# Altium PCB EC3mini.PcbDoc
Units mm, origin at the board's own origin, x right, y up, seen from the top; angles counter-clockwise.
Board outline 152.4 x 101.6 mm, 2 copper layers (Top Layer, Bottom Layer); 52 components, 46 nets, 184 pads, 46 vias.
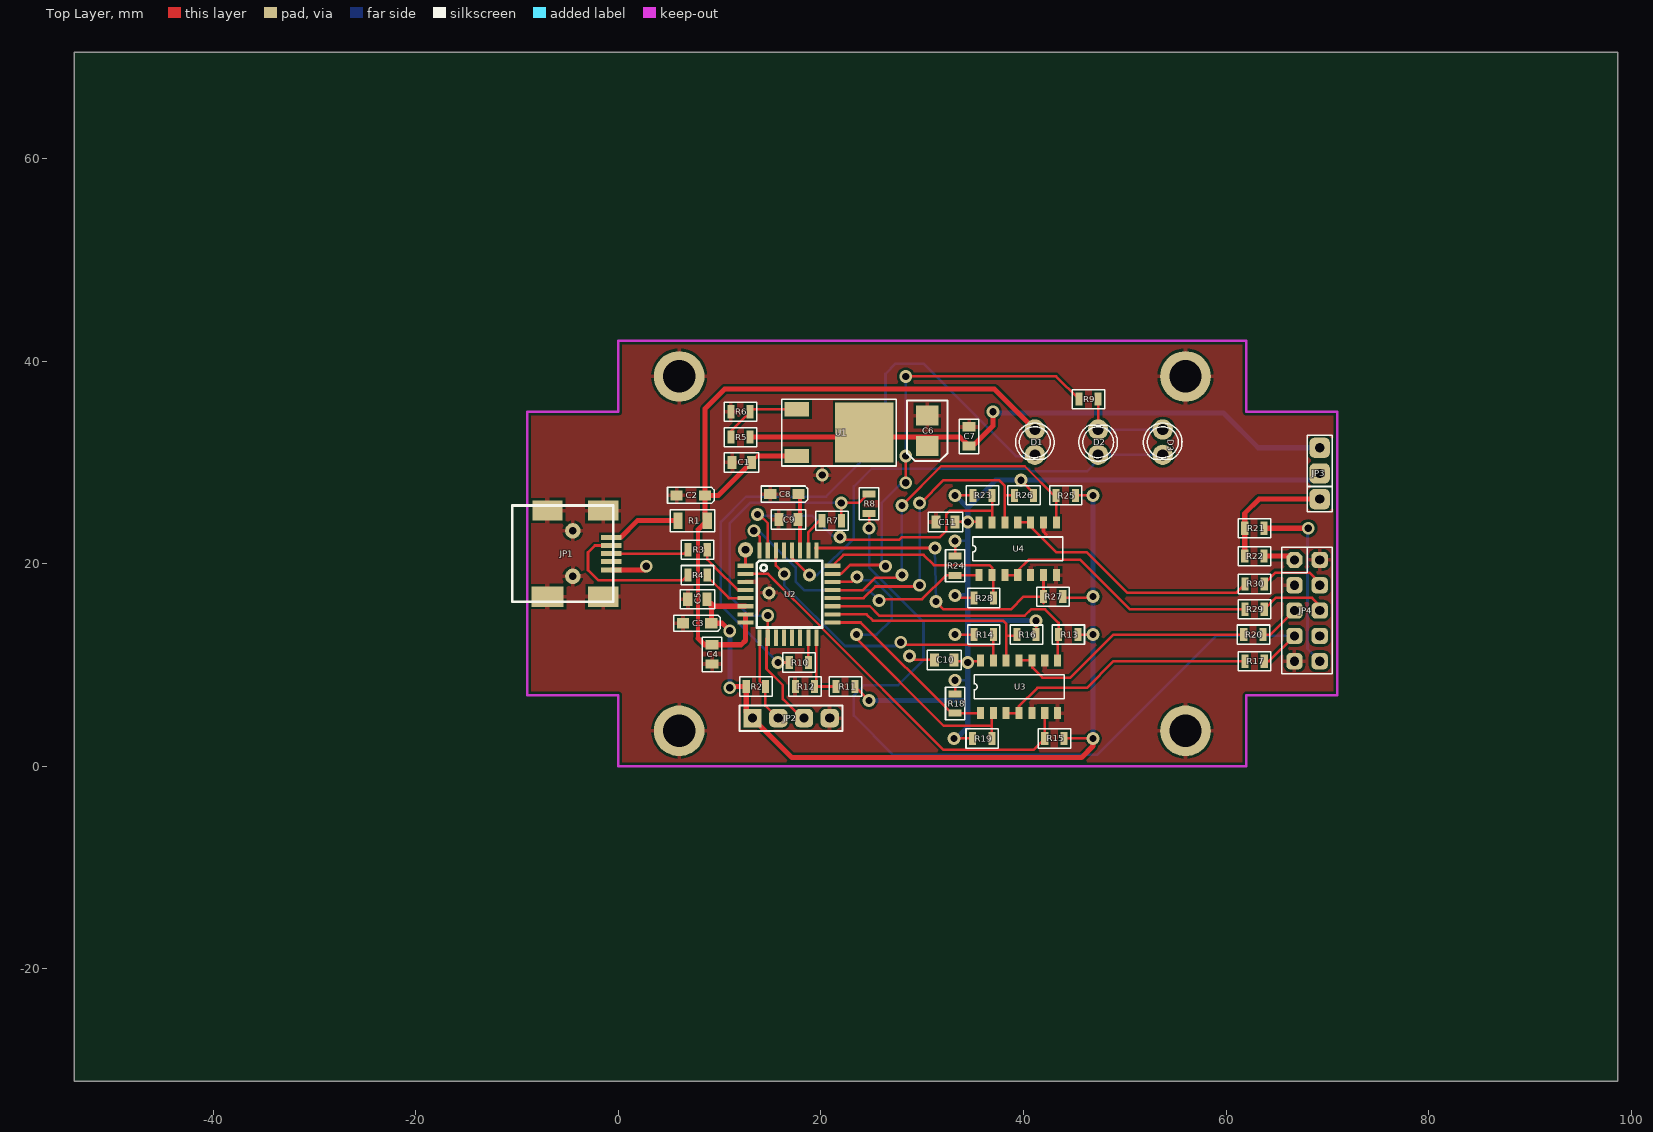
[diagram p0: Top Layer view]
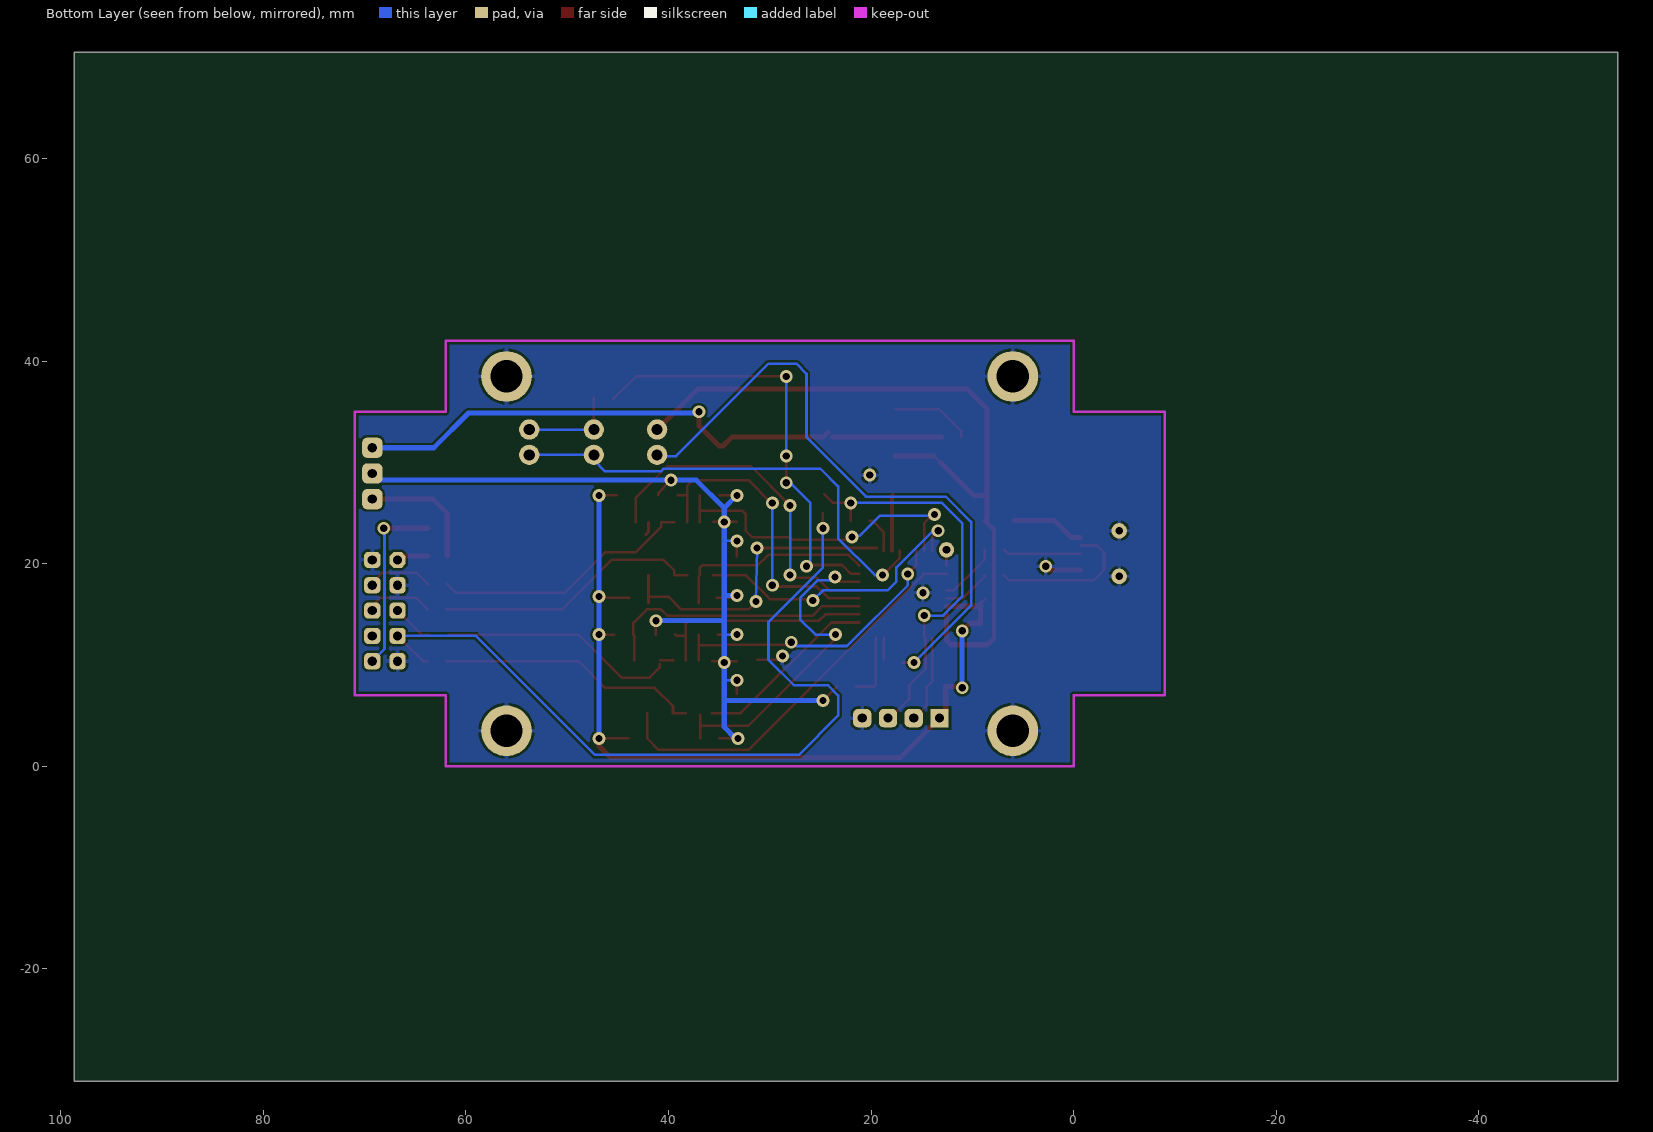
[diagram p1: Bottom Layer view, seen from below]

## Layer stack, top to bottom
Top Layer: signal copper 0.0356
Dielectric: dielectric 0.32, FR-4, Dk 4.8
Bottom Layer: signal copper 0.0356

## Board outline
-53.725,-31.1 98.675,-31.1 98.675,70.5 -53.725,70.5

## Design rules (kind name [scope] priority, off if disabled: settings)
Clearance [All] p1: gap=0.254
HoleSize [All] p1: absolutevalues=TRUE maxlimit=8 minlimit=0.025 maxpercent=80.000 minpercent=20.000
MinimumSolderMaskSliver [All] p1: minsoldermaskwidth=0
PolygonConnect PolygonConnect_1 [All vs IsNamedPolygon('GND') Or  IsNamedPolygon('GND')] p1: connectstyle=Relief reliefconductorwidth=0.4 reliefentries=4 polygonreliefangle="90 Angle"
PolygonConnect [All] p2: connectstyle=Relief reliefconductorwidth=0.254 reliefentries=4 polygonreliefangle="90 Angle"
RoutingVias [All] p1: holewidth=0.711 width=1.27 viastyle="Through Hole" minholewidth=0.711 minwidth=1.27 maxholewidth=0.711 maxwidth=1.27
SilkToSilkClearance [All] p1: silktosilkclearance=0
SilkscreenOverComponentPads [All] p1: minsilkscreentomaskgap=0
SolderMaskExpansion [All] p1: expansion=0.102
Width [All] p1: maxlimit=2 minlimit=0.2 preferedwidth=0.3
24 further rules are at their usual default settings.

## Components (designator, comment, footprint, x,y, rotation, side; value= is the part's Value field where it differs from the comment)
C1 "100n" C-0805 13.125,30 r180 top
C2 "10u" TANTAL-A 5.75,26.75 r0 top
C3 "10u" TANTAL-A 6.375,14.125 r0 top
C4 "100n" C-0805 9.25,12 r270 top
C5 "100n" C-0805 8.75,16.5 r180 top
C6 "33u" TANTAL-B(3528) 30.5,34.625 r270 top
C7 "100n" C-0805 34.625,31.625 r90 top
C8 "10u" TANTAL-A 15,26.875 r0 top
C9 "100n" C-0805 17.75,24.375 r180 top
C10 "100n" C-0805 33.125,10.5 r180 top
C11 "100n" C-0805 33.25,24.125 r180 top
D1 "LED" LED-DIP-1 41.125,32 r90 top
D2 "LED" LED-DIP-1 47.375,32 r270 top
D3 "LED" LED-DIP-1 53.75,32 r90 top
JP1 "USB_mini" miniUSBsmd -1.5,16.75 r90 top
JP2 "Header 4" HDR1X4 13.25,4.75 r0 top
JP3 "JUMPER-3" IDC1-3P 69.25,26.375 r90 top
JP4 "CON5X2" IDC2-5P 66.75,20.375 r270 top
R1 "0" R-1206 5.875,24.25 r0 top
R2 "2k" R-0805 12.625,7.875 r0 top
R3 "22" R-0805 6.875,21.375 r0 top
R4 "22" R-0805 6.875,18.875 r0 top
R5 "240" R-0805 13,32.5 r180 top
R6 "330" R-0805 13,35 r180 top
R7 "1M" R-0805 20.125,24.25 r0 top
R8 "1M5" R-0805 24.75,26.875 r270 top
R9 "470" R-0805 47.375,36.25 r180 top
R10 "470" R-0805 16.875,10.25 r0 top
R11 "1k5" R-0805 23.375,7.875 r180 top
R12 "1k" R-0805 19.375,7.875 r180 top
R13 "1k" R-0805 45.375,13 r180 top
R14 "1k" R-0805 35.125,13 r0 top
R15 "1k" R-0805 44,2.75 r180 top
R16 "1k" R-0805 41.25,13 r180 top
R17 "47" R-0805 61.875,10.375 r0 top
R18 "1k" R-0805 33.25,5.25 r90 top
R19 "1k" R-0805 36.875,2.75 r180 top
R20 "47" R-0805 61.75,13 r0 top
R21 "0" R-0805 63.75,23.5 r180 top
R22 "0" R-0805 63.75,20.75 r180 top
R23 "1k" R-0805 35,26.75 r0 top
R24 "1k" R-0805 33.25,20.75 r270 top
R25 "1k" R-0805 45.125,26.75 r180 top
R26 "1k" R-0805 41,26.75 r180 top
R27 "1k" R-0805 43.875,16.75 r180 top
R28 "1k" R-0805 35.125,16.625 r0 top
R29 "47" R-0805 61.875,15.5 r0 top
R30 "47" R-0805 61.875,18 r0 top
U1 "MC33269" SOT-428-(D-PAK) 17.625,35.25 r270 top
U2 "C8051F320" QFP32 11.75,20 r270 top
U3 "74HC125" SO14-(SOT-108-1) 35.75,5.25 r90 top
U4 "74HC125" SO14-(SOT-108-1) 35.625,18.875 r90 top

## Footprints (in the part's own frame and the unit in brackets; to place one, negate y for a bottom-side part, rotate by r counter-clockwise, add the part's x,y. Pads: shape width x height; smd on the part's side, far side on the other; paste and mask are expansions set on the pad)
C-0805 [mm]
  rect 0.9x1.3 smd: 1(0,0) 2(1.9,0)
  silkscreen extent -0.75,-0.95 2.65,0.95
HDR1X4 [mm] "Connector; Header; 4 Position"
  rect 1.8x1.8 hole 0.9: 1(0,0)
  rrect50% 1.8x1.8 hole 0.9: 2(2.54,0) 3(5.08,0) 4(7.62,0)
  silkscreen extent -1.27,-1.27 8.89,1.27
IDC1-3P [mm]
  rrect50% 2x2 hole 0.9: 1(0,0) 2(2.54,0) 3(5.08,0)
  silkscreen extent -1.25,-1.25 6.33,1.25
IDC2-5P [mm]
  oct 1.6x1.6 hole 0.9: 1(0,0)
  rrect50% 1.6x1.6 hole 0.9: 2(0,2.5) 3(2.5,0) 4(2.5,2.5) 5(5,0) 6(5,2.5) 7(7.5,0) 8(7.5,2.5) 9(10,0) 10(10,2.5)
  silkscreen extent -1.25,-1.25 11.25,3.75
LED-DIP-1 [mm]
  round 2 hole 1.1: A(1.25,0) K(-1.25,0)
  silkscreen extent -1.68,-1.9 1.91,1.9
miniUSBsmd [mm]
  rect 0.5x2 smd: 1(5.85,-0.8) 2(5.05,-0.8) 3(4.25,-0.8) 4(3.45,-0.8) 5(2.65,-0.8)
  rect 2x3.2 smd: 6(0,5.5)
  rect 2x3 smd: 6(0,0) 6(8.5,0) 6(8.5,5.5)
  round 1.524 hole 0.762: 6(2,3) 6(6.5,3)
  silkscreen extent -0.5,-1 9,9
QFP32 [mm]
  rect 0.4x1.6 smd: 1(0.2,0.8) 2(1,0.8) 3(1.8,0.8) 4(2.6,0.8) 5(3.4,0.8) 6(4.2,0.8) 7(5,0.8) 8(5.8,0.8) 17(5.8,9.4) 18(5,9.4) 19(4.2,9.4) 20(3.4,9.4) 21(2.6,9.4) 22(1.8,9.4) 23(1,9.4) 24(0.2,9.4)
  rect 1.6x0.4 smd: 9(7.3,2.2) 10(7.3,3) 11(7.3,3.8) 12(7.3,4.6) 13(7.3,5.4) 14(7.3,6.2) 15(7.3,7) 16(7.3,7.8) 25(-1.3,7.8) 26(-1.3,7) 27(-1.3,6.2) 28(-1.3,5.4) 29(-1.3,4.6) 30(-1.3,3.8) 31(-1.3,3) 32(-1.3,2.2)
  silkscreen extent -0.3,1.9 6.3,8.4
R-0805 [mm]
  rect 0.7x1.3 smd: 1(0,0) 2(1.9,0)
  silkscreen extent -0.65,-0.95 2.55,0.95
R-1206 [mm]
  rect 0.9x1.6 smd: 1(0,0) 2(2.9,0)
  silkscreen extent -0.75,-1.1 3.65,1.1
SO14-(SOT-108-1) [mm]
  rect 1.2x0.7 smd: 1(0,0) 2(0,-1.27) 3(0,-2.54) 4(0,-3.81) 5(0,-5.08) 6(0,-6.35) 7(0,-7.62) 8(5.2,-7.62) 9(5.2,-6.35) 10(5.2,-5.08) 11(5.2,-3.81) 12(5.2,-2.54) 13(5.2,-1.27) 14(5.2,0)
  silkscreen extent 1.43,-8.25 3.77,0.63
SOT-428-(D-PAK) [mm]
  rect 1.4x2.4 smd: 1(0,0) 3(4.6,0)
  rect 5.9x5.75 smd: 2(2.3,6.65)
  silkscreen extent -1,-1.5 5.6,9.82
TANTAL-A [mm]
  rect 1.2x1 smd: 1(0,0) 2(2.8,0)
  silkscreen extent -0.9,-0.8 3.7,0.8
TANTAL-B(3528) [mm]
  rect 2x2.2 smd: 1(0,0) 2(3,0)
  silkscreen extent -1.5,-2 4.5,2

## Part data
C1 C4 C5 C7 C9 C10 C11: library part C
C2 C3 C6 C8: library part C-EL-TAN
JP2: "Header, 4-Pin"
JP3: "Jumper"
R1 R2 R3 R4 R5 R6 R7 R8 R9 R10 R11 R12 R13 R14 R15 R16 R17 R18 R19 R20 R21 R22 R23 R24 R25 R26 R27 R28 R29 R30: library part R
U1: "low dropout adjustable positive voltage regulators"
U3 U4: "Four Buffers with Enable for HiZ state output"

## Free pads (board coordinates)
  round 5 hole 3.2: 0(6,3.5) 0(6,38.5) 0(56,3.5) 0(56,38.5)
  round 1.524 hole 0.762: 0(12.55,21.375)

## Via types
v1: diameter 1.27, hole 0.711, Top Layer to Bottom Layer, 46 vias

## Nets (pads, with @x,y where several pads share a name; then routed paths per layer and width w, separated by ;. In a path a pad name is that pad's centre, name@x,y a point inside that pad or via, vN(x,y) a via of type N, cw(c..) or ccw(c..) an arc to the next point about the centre after c; other vN are vias at no path point)
+3V3: C3.2 C5.1 JP2.1 R2.1 R13.1 R15.1 R25.1 R27.1 U2.6 | length 88.4
  Top Layer w0.254: C5.1 9.15,16.1 C5.1@9.175,16.075 ; v1@10.75,7.875 v1@10.875,7.875 ; R27.1@43.875,16.625 46.75,16.625 v1(46.875,16.75) ; R15.1 v1(46.875,2.75) ; R25.1 v1@46.75,26.75 ; R13.1 v1(46.875,13)
  Top Layer w0.5: 9.125,15.8 U2.6 ; C5.1@9.175,16.075 C3.2 10.25,14.125 v1(11,13.375) ; v1@10.875,7.875 R2.1 12.625,5.375 JP2.1 17.125,0.875 45.75,0.875 46.875,2 v1(46.875,2.75)
  Bottom Layer w0.254: v1@10.875,7.875 v1@11,8
  Bottom Layer w0.5: v1@11,8 v1(11,13.375) ; v1(46.875,2.75) v1(46.875,13) v1(46.875,26.75)
  other v1: 11,7.75
C2CK1: JP2.2 R2.2 U2.9 | length 8.9
  Top Layer w0.254: U2.9 13.95,8.375 14.5,7.825 14.5,6 JP2.2@15.875,4.625
C2D1: JP2.3 R7.2 R8.1 U2.10 | length 40.2
  Top Layer w0.254: v1(14.75,14.875) U2.10 14.625,12.575 14.625,9.625 16.25,8 16.25,6.625 18.125,4.75 JP2.3 ; R7.2 22.025,25.975 v1(22,26) 23.75,26 R8.1@24.625,26.875
  Bottom Layer w0.254: v1(14.75,14.875) 12.875,14.875 11,16.75 11,24 13,26 v1(22,26)
GND: C1.2 C2.1 C3.1 C4.2 C5.2 C6.1 C7.2 C8.1 C9.2 C10.2 C11.2 JP1.5 JP1.6 JP2.4 JP4.2 JP4.3 JP4.9 pad.0@6,3.5 pad.0@6,38.5 pad.0@56,3.5 pad.0@56,38.5 R6.2 R12.2 U2.3 U3.5 U3.7 U3.9 U4.5 U4.7 U4.9 | length 7.3
  Top Layer w0.254: v1(28.75,10.875) 29.125,10.5 C10.2
  Top Layer w0.3: U4.9 41.975,23.151 42.25,22.875
  Top Layer w0.5: JP1.5 v1@2.625,19.4
  other v1: 14.875,17.125 2.75,19.75 20.125,28.75
LED_1: R9.2 U2.23 | length 42.2
  Top Layer w0.254: U2.23 22,19 22.875,19.875 v1@25.875,19.875 ; v1@28.375,28.375 v1@28.375,30.125 ; v1(28.375,38.5) 43.225,38.5 R9.2
  Bottom Layer w0.254: v1(26.375,19.75) 26,20.125 26,26 v1@28.25,28.25 ; v1(28.375,30.625) v1@28.375,38.375
  other v1: 28.375,28
LED_2: D2.A D3.K U2.28 | length 45.7
  Top Layer w0.254: U2.28 17.15,20.561 v1@18.731,18.981
  Bottom Layer w0.254: v1(18.875,18.875) 19.625,18.875 23.25,22.5 23.25,27.625 25.018,29.393 40.482,29.393 40.75,29.125 46.25,29.125 D2.A@47.375,30.25 ; D2.A@47.625,30.75 D3.K@53.875,30.75
NetC6_2: C6.2 C7.1 JP3.3 R5.1 U1.2 | length 60.2
  Top Layer w0.5: R5.1 U1.2@23.825,32.5 ; U1.2 24.725,32.5 33.75,32.5 C7.1 35,31.625 37,33.625 v1(37,35)
  Bottom Layer w0.5: v1@36.75,34.875 39.75,34.875 59.75,34.875 63.17,31.455 JP3.3
NetD1_K: D1.K R10.1 | length 62.1
  Top Layer w0.254: v1(15.75,10.25) R10.1
  Bottom Layer w0.254: v1(15.75,10.25) 10.125,15.875 10.125,24.125 12.625,26.625 20.5,26.625 26.375,32.5 26.375,38.75 27.375,39.75 30.125,39.75 39.25,30.625 D1.K@41,30.625
NetD2_K: D2.K D3.A R9.1 | length 9.9
  Top Layer w0.254: D2.K@47.375,32.75 R9.1@47.375,36.375
  Bottom Layer w0.254: D2.K@47.5,33.25 D3.A
NetJP1_1: JP1.1 R1.1 | length 7.3
  Top Layer w0.5: JP1.1 0.225,22.6 1.875,24.25 R1.1
NetJP1_2: JP1.2 R4.1 | length 14.8
  Top Layer w0.254: JP1.2 -2.325,21.8 -3,21.125 -3,19.375 -2,18.375 6.375,18.375 R4.1
NetJP1_3: JP1.3 R3.1 | length 7.7
  Top Layer w0.254: JP1.3 6.5,21 R3.1
NetJP4_1: JP4.1 R22.1 | length 3.2
  Top Layer w0.5: R22.1 66.375,20.75 JP4.1
NetJP4_10: JP4.10 R21.1 | length 18.3
  Top Layer w0.5: R21.1 v1(68.125,23.5)
  Bottom Layer w0.254: 68.046,11.579 JP4.10@69.375,10.25 ; v1@68.069,23.444 v1(68.125,23.5)
  Bottom Layer w0.3: 68.046,11.579 68.046,12.376 68.046,14.876 68.046,18.374 68.046,23.421 v1(68.125,23.5)
NetR3_2: R3.2 U2.4 | length 6
  Top Layer w0.254: R3.2 8.775,20.414 9.506,19.683 11.789,17.4 U2.4
NetR4_2: R4.2 U2.5 | length 4.8
  Top Layer w0.254: R4.2 8.775,18.725 10.9,16.6 U2.5
NetR5_2: R5.2 R6.1 U1.1 | length 8
  Top Layer w0.254: R5.2 11.1,33.1 13.25,35.25 U1.1
NetR17_1: R17.1 U3.3 U3.4 | length 26.3
  Top Layer w0.254: U3.3 U3.4 U3.4@39.56,5.685 ; U3.4@39.56,5.5 39.56,5.935 41.375,7.75 46.25,7.75 48.875,10.375 R17.1
NetR20_1: R20.1 U3.10 U3.11 | length 24.7
  Top Layer w0.254: U3.11 U3.10 ; U3.10@40.875,10.125 40.875,9.75 41.875,8.75 44.625,8.75 48.875,13 R20.1
NetR29_1: R29.1 U4.3 U4.4 | length 26.6
  Top Layer w0.254: U4.3 U4.4 39.435,19.31 40.5,20.375 45.625,20.375 47.891,18.109 50.5,15.5 R29.1
NetR30_1: R30.1 U4.10 U4.11 | length 25.9
  Top Layer w0.254: U4.11 U4.10 40.705,23.67 43.25,21.125 44.452,21.125 46.25,21.125 50.25,17.125 61,17.125 R30.1
OE_TCK: R23.2 U2.31 U4.13 | length 33.2
  Top Layer w0.254: v1@14,24.75 14.75,24 U2.31 ; v1@21.625,22.375 27.75,22.375 28,22.625 31.75,22.625 32.375,23.25 32.375,24.875 32.419,24.919 32.419,24.933 32.736,25.25 36.9,25.25 ; U4.13@36.9,24.08 36.9,25.25 ; R23.2 36.9,25.25
  Bottom Layer w0.254: v1@13.875,24.75 19.125,24.75 21.125,22.75 21.625,22.75 v1@21.874,22.999 ; v1(21.875,22.625) v1@21.875,22.999
  other v1: 13.75,24.875
OE_TDI: R18.1 U2.17 U3.1 | length 18.3
  Top Layer w0.254: U2.17 23.925,14.2 32.875,5.25 U3.1
OE_TDO: R24.2 U2.32 U4.1 | length 29.1
  Top Layer w0.254: v1(13.375,23.25) 13.95,22.675 U2.32 ; v1(25.75,16.375) 25.75,16.392 25.858,16.5 30,16.5 32.35,18.85 R24.2 U4.1@35.6,18.85
  Bottom Layer w0.254: v1(13.375,23.25) 13.875,23.25 17.5,19.625 17.5,18.25 18.375,17.375 24.75,17.375 25.625,16.5 v1(25.75,16.375)
OE_TMS: R14.2 U2.30 U3.13 | length 29.6
  Top Layer w0.254: U2.30 15.55,19.825 v1(16.375,19) ; v1@28.062,12.438 28.516,11.984 33.671,11.984 33.687,12 34.586,12 34.617,11.969 37.02,11.969 ; U3.13 37.02,11.969 ; R14.2@37.02,12.995 37.02,11.969
  Bottom Layer w0.254: v1(16.375,19) 16.375,17.875 22.375,11.875 27.375,11.875 27.75,12.25 v1(27.875,12.25)
OE_VBUF: U2.29
P10: R7.1 U2.26 | length 3.7
  Top Layer w0.254: U2.26 18.75,23.125 19.875,24.25 R7.1
P23: R10.2 U2.15 | length 2.2
  Top Layer w0.254: R10.2@18.75,10.525 U2.15
PWM_OUT: pad.0@12.55,21.375 U2.1 | length 1.6
  Top Layer w0.254: U2.1 pad.0@12.55,21.375
TCK/C2D: JP4.4 R30.2 | length 6.6
  Top Layer w0.254: R30.2 64.9,19.125 68.25,19.125 69.25,18.125 JP4.4
TCK_IN: R25.2 U2.21 U4.8 | length 34.9
  Top Layer w0.254: U2.21 24.15,17.4 25.375,18.625 27.156,18.625 27.75,18.625 v1(28,18.875) ; v1(28,25.75) 31.875,29.625 40.125,29.625 43.225,26.525 U4.8@43.225,24.095
  Bottom Layer w0.254: v1(28,18.875) v1(28,25.75)
TCK_OUT: R26.2 U2.20 U4.12 | length 31
  Top Layer w0.254: U2.20 24.225,16.6 25.375,17.75 29.75,17.75 v1@29.875,17.875 ; v1(29.75,26) 29.875,26 32.125,28.25 37.6,28.25 38.165,27.685 38.165,26.75 ; U4.12 38.165,26.75 ; R26.2 38.165,26.75
  Bottom Layer w0.254: v1@29.75,18.375 29.75,25.875 v1(29.75,26)
  other v1: 29.75,17.875
TDI/C2CK: JP4.7 R8.2 R17.2 | length 81
  Top Layer w0.254: v1(24.75,23.5) R8.2 ; R17.2 64.25,10.375 JP4.7
  Bottom Layer w0.254: v1(24.75,23.5) 24.75,19.625 30.125,14.25 30.125,10.5 27.625,8 24.25,8 23.25,7 23.25,5 27.125,1.125 47.25,1.125 59,12.875 JP4.7
TDI_IN: R15.2 U2.2 U3.6 | length 39.7
  Top Layer w0.254: U2.2 14.789,19 20.131,13.658 20.131,13.619 32.125,1.625 40.975,1.625 R15.2 U3.6
TDI_OUT: R19.1 U2.22 U3.2 | length 32.8
  Top Layer w0.254: U2.22 23.075,18.2 v1(23.566,18.691) v1@23.625,18.75 ; v1@23.5,12.875 23.5,12.625 32.125,4 36.875,4 ; R19.1 36.875,4 ; U3.2@36.875,5.105 36.875,4
  Bottom Layer w0.254: v1(23.5,13) 25.5,13 27,14.5 27,16.625 25.25,18.375 23.882,18.375 v1(23.566,18.691) v1@23.566,18.684
TDO: JP4.6 R29.2 | length 6.8
  Top Layer w0.254: R29.2 64.9,16.625 68.5,16.625 69.25,15.875 JP4.6
TDO_IN: R27.2 U2.25 U4.6 | length 31.4
  Top Layer w0.254: U2.25@19.425,21.55 v1(31.25,21.55) ; v1@31.5,16.125 32.125,15.5 38.75,15.5 40,16.75 R27.2 ; R27.2@41.975,16.125 R27.2 ; U4.6 R27.2
  Bottom Layer w0.254: v1(31.25,21.55) 31.375,16.125 31.372,16.128 v1(31.372,16.262)
TDO_OUT: R28.2 U2.24 U4.2 | length 20.2
  Top Layer w0.254: U2.24@21.206,19.856 U2.24 22.225,20.875 30.125,20.875 31.144,19.856 36.644,19.856 36.895,19.605 U4.2 ; 37.009,17.891 37.025,17.875 ; R28.2@37.025,16.125 R28.2 37.025,17.875 ; U4.2@37.025,18.745 37.025,17.875
TMS: JP4.5 R20.2 | length 4.1
  Top Layer w0.254: R20.2 64.375,13 JP4.5
TMS_IN: R13.2 U2.19 U3.8 | length 27.1
  Top Layer w0.254: U2.19 24.825,15.8 25.742,14.883 38.21,14.883 38.218,14.875 40.125,14.875 40.75,15.5 42.125,15.5 43.475,14.15 R13.2 ; U3.8 R13.2@43.37,12.895
TMS_OUT: R16.2 U2.18 U3.12 | length 22.3
  Top Layer w0.254: U2.18 24.5,15 25.125,14.375 38,14.375 38.29,14.085 38.29,12.875 ; U3.12 38.29,12.875 ; R16.2@39.35,13.025 R16.2 39.225,12.875 38.29,12.875
V_BUF: C10.1 C11.1 JP3.2 R11.1 R14.1 R16.1 R18.2 R19.2 R23.1 R24.1 R26.1 R28.1 U3.14 U4.14 | length 102.6
  Top Layer w0.254: R11.1 v1(24.75,6.5) ; v1@33.25,2.75 R19.2 ; R18.2 v1@33.25,8.625 ; C10.1@33.25,10.375 U3.14@35.675,10.375 ; v1@33.25,16.625 R28.1@35.25,16.625 ; R24.1 v1(33.25,22.25) ; C11.1 v1(34.5,24.125) U4.14@35.575,24.125 ; v1@33.375,26.75 R23.1 ; v1@33.5,13 R14.1 ; v1(39.75,28.25) 41,27 R26.1 ; R16.1 v1(41.25,14.375) v1@41.25,14.5
  Bottom Layer w0.254: v1(33.25,8.5) 34.5,8.5 ; v1(33.25,13) 34.5,13 ; v1(33.25,22.25) 34.5,22.25 ; JP3.2@69.136,28.801 JP3.2
  Bottom Layer w0.5: v1(24.75,6.5) 34.5,6.5 ; v1(33.25,16.875) 34.5,16.875 ; v1(33.25,26.75) 34.5,25.5 ; v1@33.375,2.75 34.5,3.875 34.5,6.5 ; v1(34.5,10.25) 34.5,8.5 34.5,6.5 ; v1@34.5,10.5 34.5,13 34.5,14.375 ; v1(41.25,14.375) 34.5,14.375 ; JP3.2@69.136,28.801 68.585,28.25 v1(39.75,28.25) 37.25,28.25 34.5,25.5 ; 34.5,14.375 34.5,16.125 34.5,16.875 v1(34.5,24.125) 34.5,25.5
  other v1: 33.125,2.75
V_EXT: JP3.1 R21.2 R22.2 | length 12.2
  Top Layer w0.5: R22.2 R21.2 61.85,24.975 63.25,26.375 JP3.1
V_USB: C1.1 C2.2 C4.1 D1.A R1.2 U1.3 U2.7 U2.8 | length 76.6
  Top Layer w0.254: R1.2@8.55,24.45 R1.2@8.75,24.25 ; C1.1 13.775,30.65
  Top Layer w0.4: 7.875,12.625 7.846,12.654 7.846,23.346 7.875,23.375
  Top Layer w0.5: 7.875,12.625 8.5,12 12.125,12 12.55,12.425 U2.7 ; 7.875,23.375 R1.2@8.75,24.25 ; R1.2@8.55,24.45 C2.2 ; C1.1 9.875,26.75 C2.2 ; 13.775,30.65 U1.3 ; D1.A 37.125,37.25 10.5,37.25 8.55,35.3 C2.2
VBUF_AI: R11.2 R12.1 U2.16 | length 6.6
  Top Layer w0.254: U2.16 19.55,8.05 19.725,7.875 R11.2
VREF: C8.2 C9.1 U2.27 | length 5.6
  Top Layer w0.254: C8.2 C8.2@17.95,26.725
  Top Layer w0.4: U2.27 C8.2@17.95,26.725
pads on no net: JP1.4 JP4.8 U2.11 U2.12 U2.13 U2.14

## Polygon pours and split planes (outlines as drawn)
GND on Bottom Layer "GND" (solid, remove dead copper, pour order 1001): 0,42 62,42 62,35 71,35 71,7 62,7 62,0 0,0 0,7 -9,7 -9,35 0,35
GND on Top Layer "GND" (solid, remove dead copper, pour order 1000): 0,42 62,42 62,35 71,35 71,7 62,7 62,0 0,0 0,7 -9,7 -9,35 0,35

## Keep-outs
Keep-Out Layer:
  lines w0.254: -9,7 -9,35 0,35 0,42 62,42 62,35 71,35 71,7 62,7 62,0 0,0 0,7 -9,7

## Silkscreen, mask and mechanical layers (free items; w line width, h text height)
Mechanical 1:
  lines w0.254: -15,-5 75,-5 75,45 -15,45 -15,-5